# EAGLE board StepperDriver Rev0 (EAGLE 6.1)
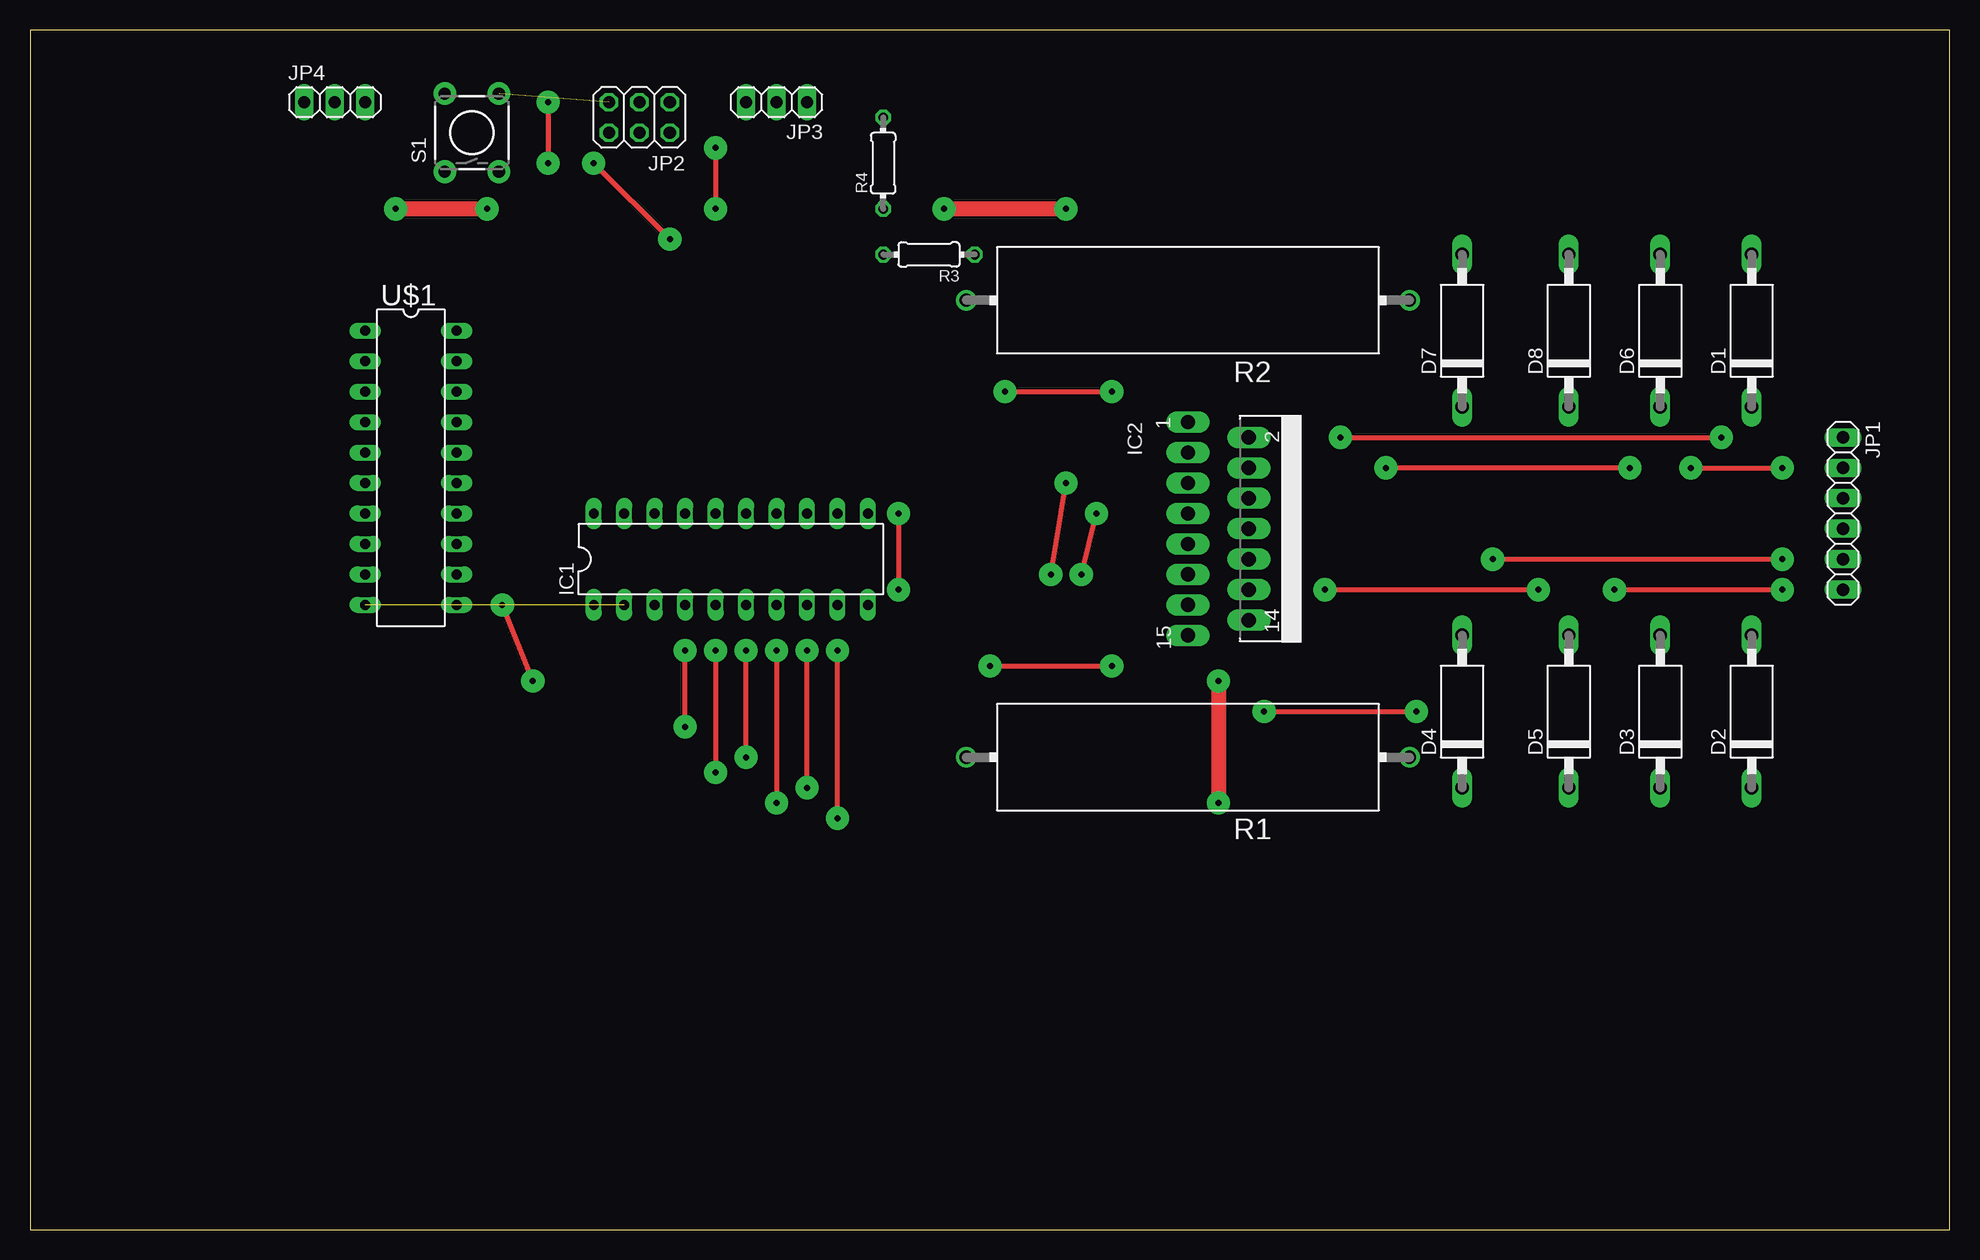
[diagram p0: board, top side]
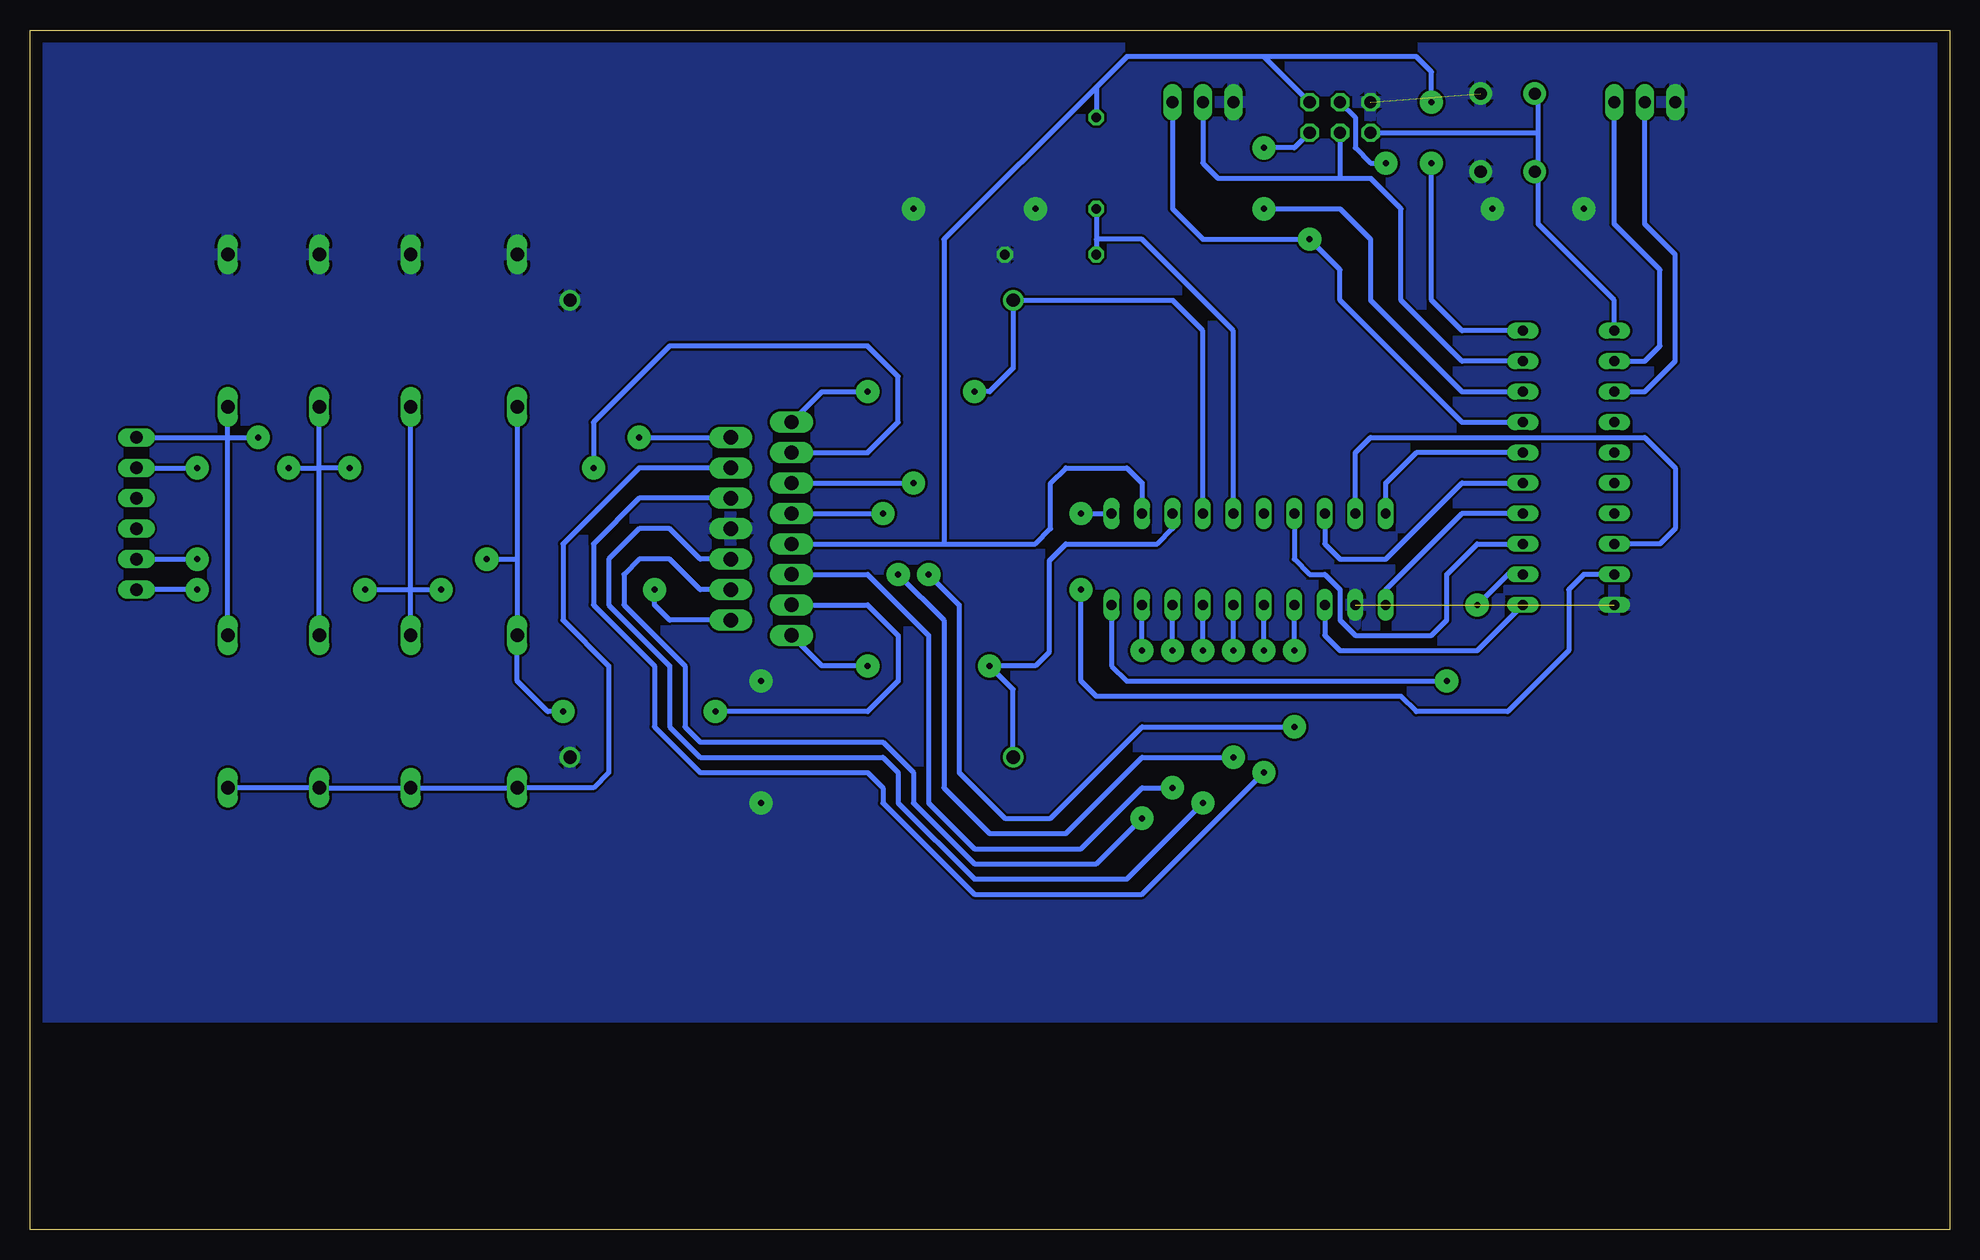
[diagram p1: board, bottom side, seen from below]

Size 160 x 100 mm. Coordinates in mm from the lower left corner, seen from the top.
Outline: 0,0 160,0 160,100 0,100 0,0
Copper layers (1*16): Top 0.035mm / dielectric 1.5mm / Bottom 0.035mm
Design rules: minimum track width 10mil, minimum drill 24mil, track to track 8mil, track to pad 8mil, pad to pad 8mil, via to via 8mil, smd to smd 8mil, copper to edge 40mil, drill to drill 8mil, minimum pad ring 10mil, minimum via ring 8mil, stop-mask expansion 4mil, vias tented up to drill 0mil, thermal gap 10mil

## Footprints (pad centres in the part's own frame; a part is rotated, then mirrored left to right if it is on the bottom)
DO15-12 = drill 1.118 long: A 6.35,0; C -6.35,0
DIL20 = drill 0.813 long: 1 -11.43,-3.81; 2 -8.89,-3.81; 3 -6.35,-3.81; 4 -3.81,-3.81; 5 -1.27,-3.81; 6 1.27,-3.81; 7 3.81,-3.81; 8 6.35,-3.81; 9 8.89,-3.81; 10 11.43,-3.81; 11 11.43,3.81; 12 8.89,3.81; 13 6.35,3.81; 14 3.81,3.81; 15 1.27,3.81; 16 -1.27,3.81; 17 -3.81,3.81; 18 -6.35,3.81; 19 -8.89,3.81; 20 -11.43,3.81
MULTIWATT-15 = drill 1.2 long: 1 -8.89,-7.62; 2 -7.62,-2.54; 3 -6.35,-7.62; 4 -5.08,-2.54; 5 -3.81,-7.62; 6 -2.54,-2.54; 7 -1.27,-7.62; 8 0,-2.54; 9 1.27,-7.62; 10 2.54,-2.54; 11 3.81,-7.62; 12 5.08,-2.54; 13 6.35,-7.62; 14 7.62,-2.54; 15 8.89,-7.62
1X06 = drill 1.016 long: 1 -6.35,0; 2 -3.81,0; 3 -1.27,0; 4 1.27,0; 5 3.81,0; 6 6.35,0
2X03 = drill 1.016 octagon: 1 -2.54,-1.27; 2 -2.54,1.27; 3 0,-1.27; 4 0,1.27; 5 2.54,-1.27; 6 2.54,1.27
1X03 = drill 1.016 long: 1 -2.54,0; 2 0,0; 3 2.54,0
HPS932 = drill 1.1 pad 1.7: 1 -18.47,0; 2 18.47,0
0204/7 = drill 0.813 octagon: 1 -3.81,0; 2 3.81,0
TACTILE-PTH = drill 1.016 pad 1.88: 1 -3.251,2.261; 2 3.251,2.261; 3 -3.251,-2.261; 4 3.251,-2.261

## Placement (x,y rotation side)
D1  1N5060GP  [DO15-12]  143.51,74.93 90 top
D2  1N5060GP  [DO15-12]  143.51,43.18 90 top
D3  1N5060GP  [DO15-12]  135.89,43.18 90 top
D4  1N5060GP  [DO15-12]  119.38,43.18 90 top
D5  1N5060GP  [DO15-12]  128.27,43.18 90 top
D6  1N5060GP  [DO15-12]  135.89,74.93 90 top
D7  1N5060GP  [DO15-12]  119.38,74.93 90 top
D8  1N5060GP  [DO15-12]  128.27,74.93 90 top
IC1  L297  [DIL20]  58.42,55.88 0 top
IC2  L298  [MULTIWATT-15]  104.14,58.42 270 top
JP1  MOTOR  [1X06]  151.13,59.69 270 top
JP2  ISP  [2X03]  50.8,92.71 180 top
JP3  I2C  [1X03]  62.23,93.98 180 top
JP4  SERIAL  [1X03]  25.4,93.98 0 top
R1  0.47  [HPS932]  96.52,39.37 180 top
R2  0.47  [HPS932]  96.52,77.47 180 top
R3  1K  [0204/7]  74.93,81.28 180 top
R4  10K  [0204/7]  71.12,88.9 90 top
S1  [TACTILE-PTH]  36.83,91.44 90 top
U$1  TINY2313-*P*  [DIL20]  31.75,63.5 270 top

## Library data of the parts
D1-D8 = diode
IC1 = st-microelectronics; MPN: L297/1; OC_FARNELL: 1094209; OC_NEWARK: 56P8258
IC2 = st-microelectronics; MPN: L298N; OC_FARNELL: 1589425; OC_NEWARK: 32M1527
JP1-JP4 = pinhead
R1 R2 = resistor-power; OC_FARNELL: unknown; OC_NEWARK: unknown
R3 R4 = resistor
S1 = SparkFun-Electromechanical
U$1 = avr-7

## Nets
GND: D1.A D6.A D7.A D8.A IC1.2 IC2.8 JP2.5 JP3.3 JP4.1 R1.1 R2.1 R3.1 S1.3 S1.4 U$1.10
N$6: IC1.10 U$1.12
N$7: D2.C D3.C D4.C D5.C IC2.4
N$8: IC1.14 IC2.1 R2.2
N$9: IC1.18 U$1.15
N$10: IC1.17 U$1.13
N$11: IC1.20 U$1.16
N$12: IC1.13 IC2.15 R1.2
N$13: IC1.1 U$1.14
N$15: IC1.19 U$1.8
N$18: IC1.12 IC2.9 JP2.1 R4.2 U$1.20
N$19: D4.A D7.C IC2.13 JP1.5
N$21: IC1.4 IC2.5
N$22: JP4.2 U$1.3
N$23: IC1.15 R3.2 R4.1
N$24: JP4.3 U$1.2
N$25: JP2.3 JP3.1 U$1.17
N$26: JP2.2 U$1.18
N$27: JP2.4 JP3.2 U$1.19
N$28: D1.C D2.A IC2.2 JP1.1
N$29: IC1.5 IC2.6
N$30: IC1.3 U$1.11
N$32: JP2.6 S1.1 S1.2 U$1.1
N$33: IC1.6 IC2.7
N$34: IC1.7 IC2.10
N$35: D5.A D8.C IC2.14 JP1.6
N$36: IC1.8 IC2.11
N$37: IC1.9 IC2.12
N$38: D3.A D6.C IC2.3 JP1.2
N$39: IC1.11 U$1.9

## Tracks (layer width: path | path; a pad name or v marks a point on that pad's centre or on a via)
GND  (via drill 0.5 pad 1.93)  (2 unrouted)
  Top 1.27: v30.48,85.09 v38.1,85.09 | v76.2,85.09 v86.36,85.09 | v99.06,45.72 v99.06,35.56
  pour Bottom: 0,99.06 160.02,99.06 160.02,17.78 0,17.78 0,97.79
N$6  (via drill 0.5 pad 1.93)
  Top 0.406: v39.37,52.07 v41.91,45.72
  Bottom 0.406: v39.37,52.07 36.83,54.61 U$1.12 | IC1.10 69.85,46.99 68.58,45.72 v41.91,45.72
N$7
  Bottom 0.406: D2.C D3.C D5.C D4.C 113.03,36.83 111.76,38.1 111.76,46.99 115.57,50.8 115.57,57.15 109.22,63.5 IC2.4
N$8  (via drill 0.5 pad 1.93)
  Top 0.406: v81.28,69.85 v90.17,69.85
  Bottom 0.406: IC1.14 62.23,74.93 64.77,77.47 R2.2 78.05,71.81 80.01,69.85 v81.28,69.85 | IC2.1 93.98,69.85 v90.17,69.85
N$9
  Bottom 0.406: IC1.18 52.07,57.15 50.8,55.88 46.99,55.88 40.64,62.23 U$1.15
N$10
  Bottom 0.406: IC1.17 54.61,55.88 53.34,54.61 52.07,54.61 50.8,53.34 50.8,50.8 49.53,49.53 43.18,49.53 41.91,50.8 41.91,54.61 39.37,57.15 U$1.13
N$11
  Bottom 0.406: U$1.16 44.45,64.77 46.99,62.23 IC1.20
N$12  (via drill 0.5 pad 1.93)
  Top 0.406: v80.01,46.99 v90.17,46.99
  Bottom 0.406: v90.17,46.99 93.98,46.99 IC2.15 | IC1.13 64.77,58.42 66.04,57.15 73.66,57.15 75.04,55.77 75.04,48.15 76.2,46.99 v80.01,46.99 78.05,45.03 R1.2
N$13
  Bottom 0.406: U$1.14 40.64,59.69 46.99,53.34 IC1.1
N$15
  Bottom 0.406: IC1.19 49.53,64.77 48.26,66.04 25.4,66.04 22.86,63.5 22.86,58.42 24.13,57.15 U$1.8
N$18  (via drill 0.5 pad 1.93)
  Top 0.406: v43.18,93.98 v43.18,88.9
  Bottom 0.406: v43.18,93.98 43.18,96.52 44.45,97.79 57.15,97.79 | JP2.1 57.15,97.79 | 57.15,97.79 68.58,97.79 71.12,95.25 | 71.12,95.25 R4.2 | U$1.20 40.64,74.93 43.18,77.47 v43.18,88.9 | IC2.9 83.82,57.15 | 83.82,57.15 76.2,57.15 74.93,58.42 74.93,62.23 73.66,63.5 68.58,63.5 67.31,62.23 IC1.12 | 71.12,95.25 83.82,82.55 83.82,57.15
N$19  (via drill 0.5 pad 1.93)
  Top 0.406: v121.92,55.88 v146.05,55.88 | v102.87,43.18 v115.57,43.18
  Bottom 0.406: D7.C 119.38,55.88 | 119.38,55.88 D4.A 119.38,45.72 116.84,43.18 v115.57,43.18 | JP1.5 v146.05,55.88 | IC2.13 90.17,52.07 87.63,49.53 87.63,45.72 90.17,43.18 v102.87,43.18 | v121.92,55.88 119.38,55.88
N$21  (via drill 0.5 pad 1.93)
  Top 0.406: v85.09,54.61 v86.36,62.23 | v54.61,41.91 v54.61,48.26
  Bottom 0.406: IC2.5 v86.36,62.23 | v85.09,54.61 82.55,52.07 82.55,38.1 78.74,34.29 74.93,34.29 67.31,41.91 v54.61,41.91 | v54.61,48.26 IC1.4
N$22
  Bottom 0.406: U$1.3 25.4,69.85 22.86,72.39 22.86,81.28 25.4,83.82 JP4.2
N$23
  Bottom 0.406: R4.1 71.12,82.55 | 71.12,82.55 R3.2 | IC1.15 59.69,74.93 67.31,82.55 71.12,82.55
N$24
  Bottom 0.406: U$1.2 25.4,72.39 24.13,73.66 24.13,80.01 27.94,83.82 JP4.3
N$25  (via drill 0.5 pad 1.93)
  Top 0.406: v46.99,88.9 v53.34,82.55
  Bottom 0.406: JP3.1 64.77,85.09 62.23,82.55 v53.34,82.55 50.8,80.01 50.8,77.47 40.64,67.31 U$1.17 | JP2.3 49.53,92.71 49.53,90.17 48.26,88.9 v46.99,88.9
N$26  (via drill 0.5 pad 1.93)
  Top 0.406: v57.15,90.17 v57.15,85.09
  Bottom 0.406: JP2.2 54.61,90.17 v57.15,90.17 | v57.15,85.09 50.8,85.09 48.26,82.55 48.26,77.47 40.64,69.85 U$1.18
N$27
  Bottom 0.406: JP3.2 62.23,88.9 60.96,87.63 50.8,87.63 | 50.8,87.63 48.26,87.63 45.72,85.09 45.72,77.47 40.64,72.39 U$1.19 | JP2.4 50.8,87.63
N$28  (via drill 0.5 pad 1.93)
  Top 0.406: v109.22,66.04 v140.97,66.04
  Bottom 0.406: D2.A 143.51,66.04 | 143.51,66.04 D1.C | JP1.1 143.51,66.04 | 143.51,66.04 v140.97,66.04 | v109.22,66.04 IC2.2
N$29  (via drill 0.5 pad 1.93)
  Top 0.406: v57.15,48.26 v57.15,38.1
  Bottom 0.406: IC2.6 109.22,60.96 113.03,57.15 113.03,52.07 107.95,46.99 107.95,41.91 104.14,38.1 90.17,38.1 88.9,36.83 88.9,35.56 81.28,27.94 67.31,27.94 v57.15,38.1 | v57.15,48.26 IC1.5
N$30
  Bottom 0.406: IC1.3 52.07,49.53 50.8,48.26 39.37,48.26 U$1.11
N$32
  Bottom 0.406: 34.29,91.44 34.29,94.69 | 34.29,94.69 34.29,95.25 | JP2.6 34.29,91.44 | U$1.1 27.94,77.47 34.29,83.82 34.29,88.19 S1.1 34.57,88.27 34.29,88.27 34.29,91.44 | S1.2 34.29,94.69
N$33  (via drill 0.5 pad 1.93)
  Top 0.406: v87.63,54.61 v88.9,59.69 | v59.69,39.37 v59.69,48.26
  Bottom 0.406: IC2.7 v88.9,59.69 | v87.63,54.61 83.82,50.8 83.82,36.83 80.01,33.02 73.66,33.02 67.31,39.37 v59.69,39.37 | v59.69,48.26 IC1.6
N$34  (via drill 0.5 pad 1.93)
  Top 0.406: v62.23,48.26 v62.23,35.56
  Bottom 0.406: IC2.10 104.14,55.88 106.68,58.42 109.22,58.42 111.76,55.88 111.76,52.07 106.68,46.99 106.68,41.91 104.14,39.37 88.9,39.37 87.63,38.1 87.63,35.56 81.28,29.21 68.58,29.21 v62.23,35.56 | v62.23,48.26 IC1.7
N$35  (via drill 0.5 pad 1.93)
  Top 0.406: v107.95,53.34 v125.73,53.34 | v132.08,53.34 v146.05,53.34
  Bottom 0.406: D5.A 128.27,53.34 | 128.27,53.34 D8.C | v132.08,53.34 128.27,53.34 | v146.05,53.34 JP1.6 | 128.27,53.34 v125.73,53.34 | IC2.14 106.68,50.8 107.95,52.07 v107.95,53.34
N$36  (via drill 0.5 pad 1.93)
  Top 0.406: v64.77,36.83 v64.77,48.26
  Bottom 0.406: IC2.11 90.17,54.61 85.09,49.53 85.09,35.56 81.28,31.75 72.39,31.75 67.31,36.83 v64.77,36.83 | v64.77,48.26 IC1.8
N$37  (via drill 0.5 pad 1.93)
  Top 0.406: v67.31,34.29 v67.31,48.26
  Bottom 0.406: IC2.12 104.14,53.34 106.68,55.88 109.22,55.88 110.49,54.61 110.49,52.07 105.41,46.99 105.41,41.91 104.14,40.64 88.9,40.64 86.36,38.1 86.36,35.56 81.28,30.48 71.12,30.48 v67.31,34.29 | v67.31,48.26 IC1.9
N$38  (via drill 0.5 pad 1.93)
  Top 0.406: v138.43,63.5 v146.05,63.5 | v133.35,63.5 v113.03,63.5
  Bottom 0.406: D3.A 135.89,63.5 | 135.89,63.5 D6.C | JP1.2 v146.05,63.5 | v138.43,63.5 135.89,63.5 | v133.35,63.5 135.89,63.5 | IC2.3 90.17,64.77 87.63,67.31 87.63,71.12 90.17,73.66 106.68,73.66 113.03,67.31 v113.03,63.5
N$39  (via drill 0.5 pad 1.93)
  Top 0.406: v72.39,59.69 v72.39,53.34
  Bottom 0.406: U$1.9 30.48,54.61 31.75,53.34 31.75,48.26 36.83,43.18 44.45,43.18 45.72,44.45 71.12,44.45 72.39,45.72 v72.39,53.34 | v72.39,59.69 IC1.11